# EAGLE board Drums (EAGLE 8.5.0)
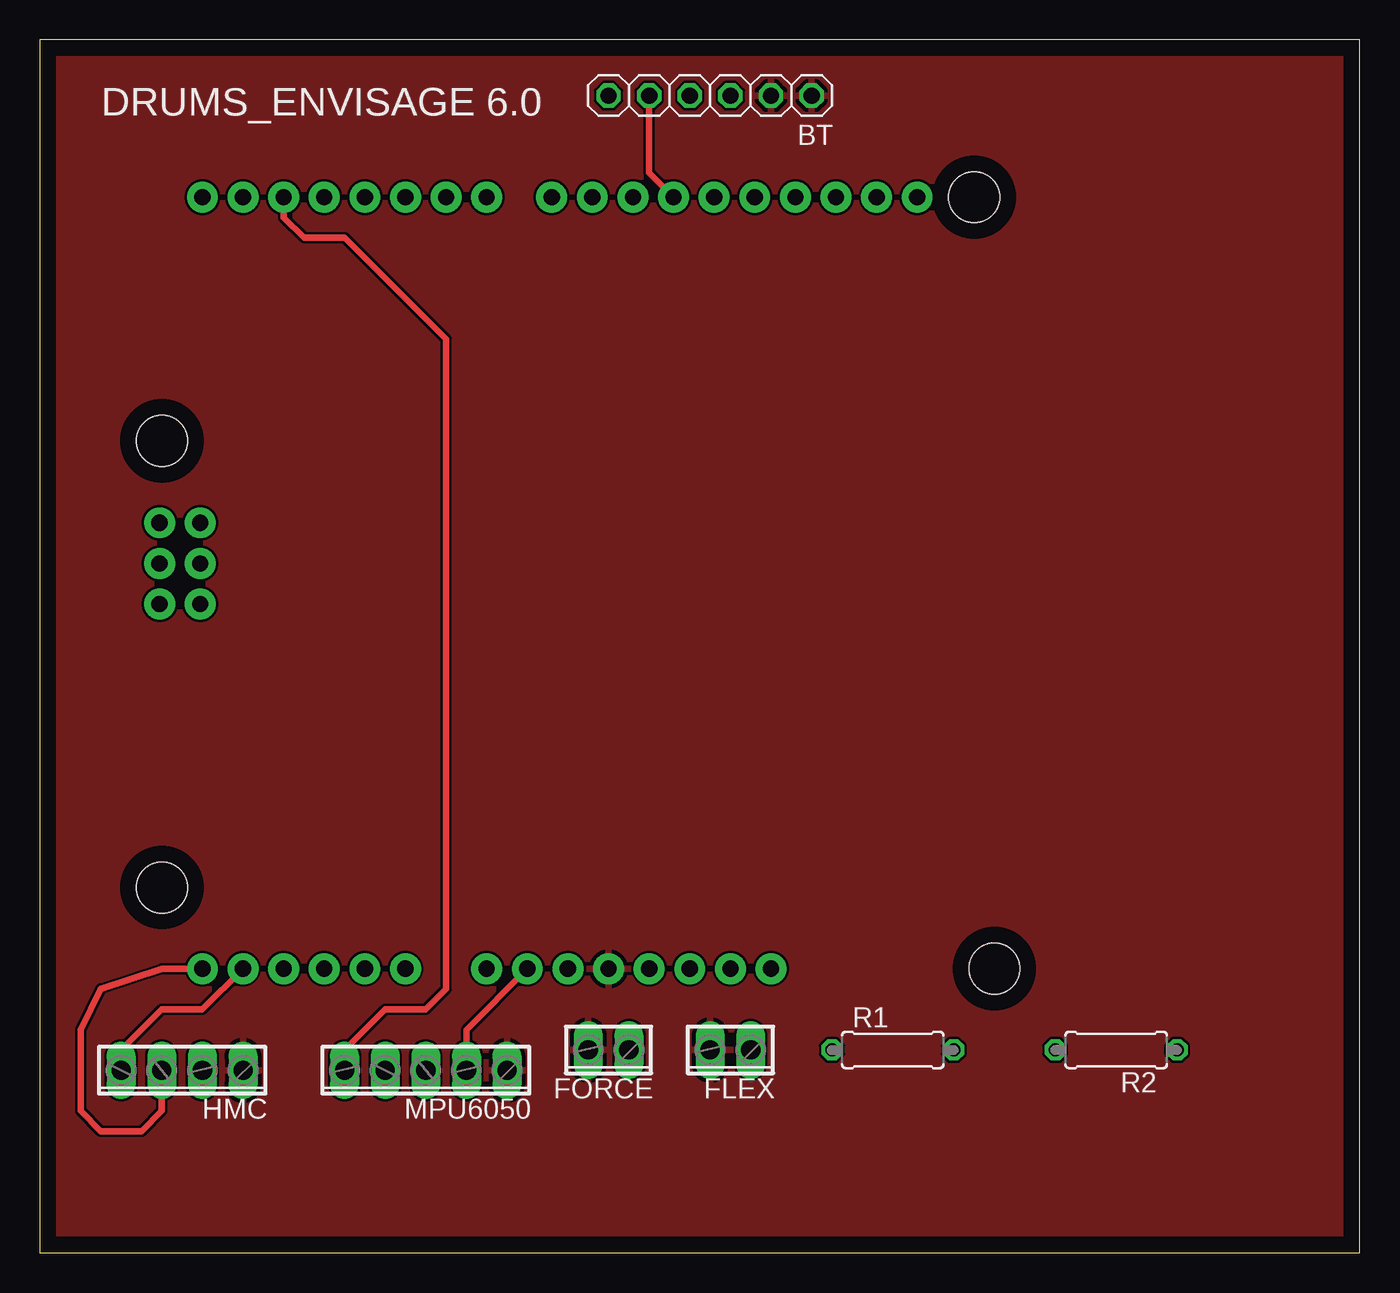
[diagram p0: board, top side]
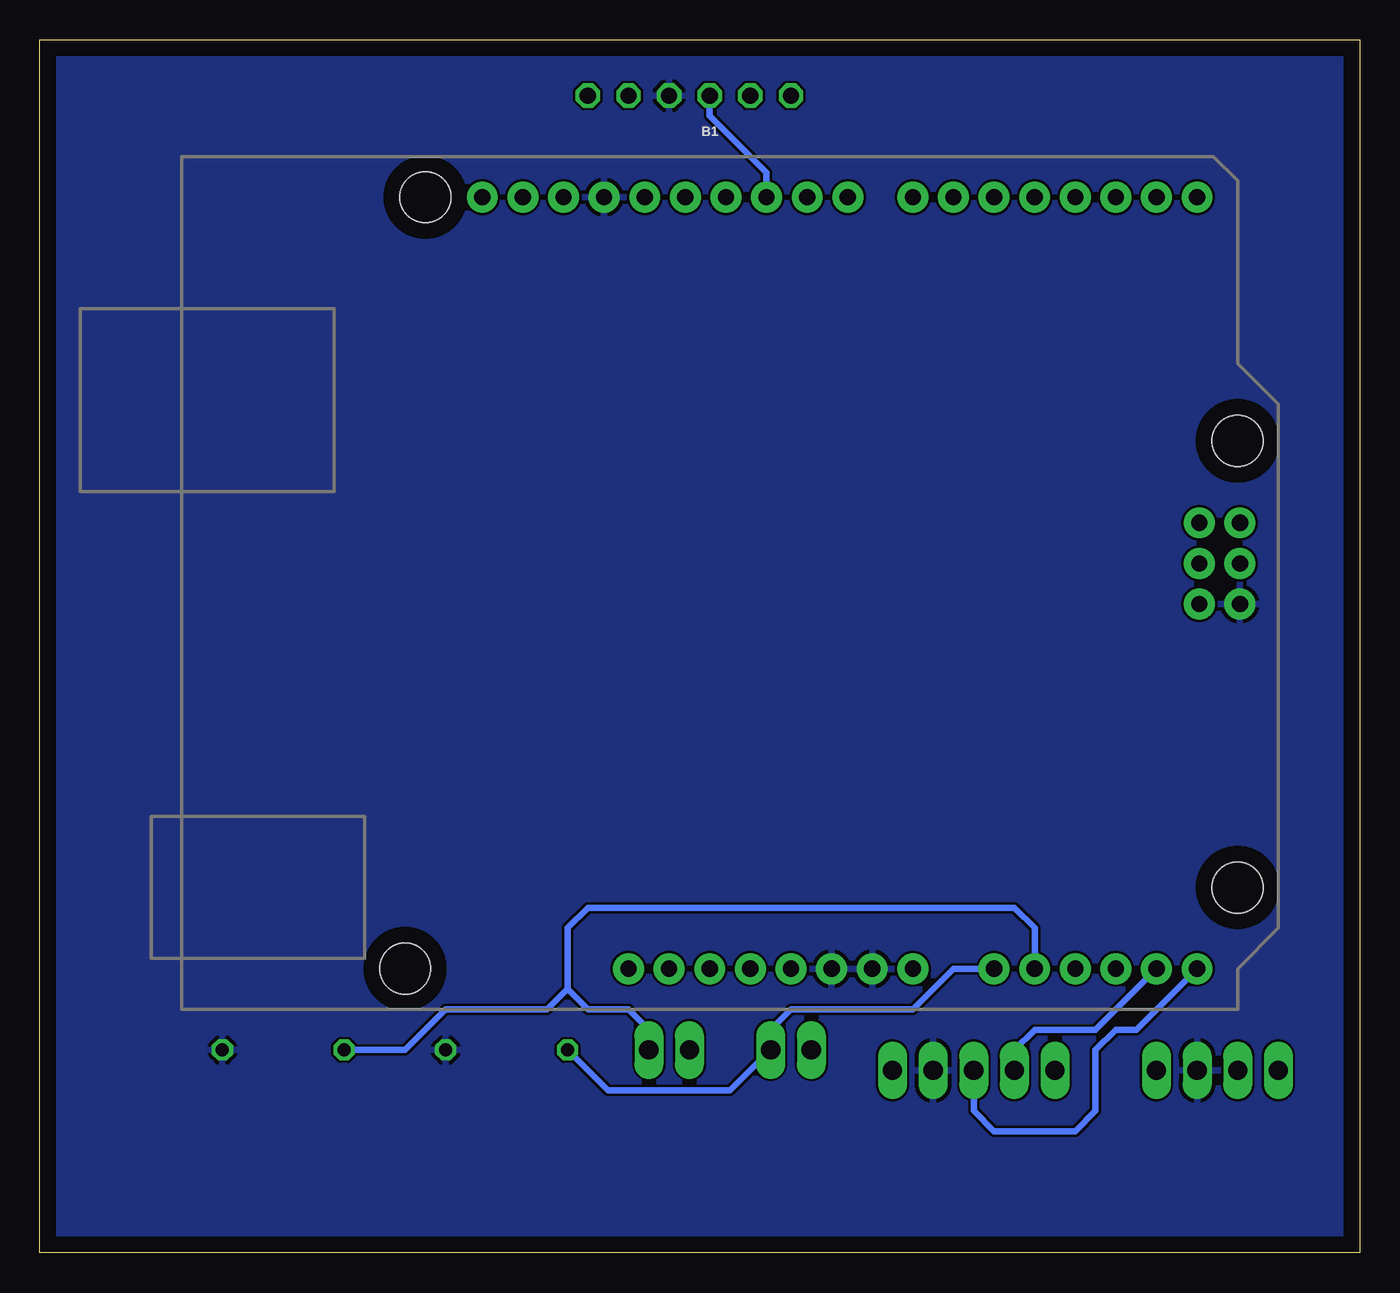
[diagram p1: board, bottom side, seen from below]

Size 82.53 x 75.87 mm. Coordinates in mm from the lower left corner, seen from the top.
Outline: 0,0 82.53,0 82.53,75.87 0,75.87 0,0
Copper layers (1*16): Top 0.035mm / dielectric 1.5mm / Bottom 0.035mm
Design rules "default": minimum track width 6mil, minimum drill 0.35mm, track to track 6mil, track to pad 6mil, pad to pad 6mil, via to via 6mil, smd to smd 6mil, copper to edge 40mil, drill to drill 6mil, minimum pad ring 10mil, minimum via ring 8mil, stop-mask expansion 4mil, vias tented up to drill 0mil, thermal gap 10mil

## Footprints (pad centres in the part's own frame; a part is rotated, then mirrored left to right if it is on the bottom)
ARDUINO_R3 = drill 1.016 pad 1.93: 3.3V 2.54,-24.13; 5V 5.08,-24.13; A0 17.78,-24.13; A1 20.32,-24.13; A2 22.86,-24.13; A3 25.4,-24.13; A4 27.94,-24.13; A5 30.48,-24.13; AREF -9.144,24.13; D0 30.48,24.13; D1 27.94,24.13; D2 25.4,24.13; D3 22.86,24.13; D4 20.32,24.13; D5 17.78,24.13; D6 15.24,24.13; D7 12.7,24.13; D8 8.636,24.13; D9 6.096,24.13; D10 3.556,24.13; D11 1.016,24.13; D12 -1.524,24.13; D13 -4.064,24.13; GND@1 7.62,-24.13; GND@2 10.16,-24.13; GND@3 -6.604,24.13; GND@4 33.16,-1.32; IOREF -2.54,-24.13; MISO 30.62,3.76; MOSI 33.16,1.22; NC -5.08,-24.13; RESET@1 0,-24.13; RESET@2 30.62,-1.32; SCK 30.62,1.22; SCL -14.224,24.13; SDA -11.684,24.13; VCC 33.16,3.76; VIN 12.7,-24.13 | hole 3.175: -17.78,24.13; 33.02,8.89; 33.02,-19.05; -19.05,-24.13
1X06 = drill 1.016 octagon: 1 -6.35,0; 2 -3.81,0; 3 -1.27,0; 4 1.27,0; 5 3.81,0; 6 6.35,0
2POL254 = drill 1.2 long: 1 -1.27,0; 2 1.27,0
4POL254 = drill 1.2 long: 1 -3.81,0; 2 -1.27,0; 3 1.27,0; 4 3.81,0
5POL254 = drill 1.2 long: 1 -5.08,0; 2 -2.54,0; 3 0,0; 4 2.54,0; 5 5.08,0
0207/7 = drill 0.813 octagon: 1 -3.81,0; 2 3.81,0

## Placement (x,y rotation side)
B1  ARDUINO_UNO_R3  [ARDUINO_R3]  40.64,41.91 0 bottom
BT  [1X06]  41.91,72.39 180 top
FLEX  [2POL254]  43.18,12.7 180 top
FORCE  [2POL254]  35.56,12.7 180 top
HMC  [4POL254]  8.89,11.43 180 top
MPU6050  [5POL254]  24.13,11.43 180 top
R1  [0207/7]  53.34,12.7 0 top
R2  [0207/7]  67.31,12.7 180 top

## Library data of the parts
B1 = SparkfunBoards
BT R1 R2 = adafruit
FLEX FORCE HMC MPU6050 = con-phoenix-254; OC_FARNELL: unknown; OC_NEWARK: unknown

## Nets
5V: B1.5V BT.1 BT.2 FLEX.2 FORCE.2 HMC.1 MPU6050.1
GND: B1.GND@1 B1.GND@2 B1.GND@3 B1.GND@4 BT.3 HMC.2 MPU6050.2 R1.2 R2.1
N$1: B1.A5 HMC.3 MPU6050.3
N$2: B1.A4 HMC.4 MPU6050.4
N$3: B1.D2 MPU6050.5
N$4: B1.A0 FORCE.1 R1.1
N$5: B1.D10 BT.4
N$6: B1.D11 BT.5
N$7: B1.A1 FLEX.1 R2.2

## Tracks (layer width: path | path; a pad name or v marks a point on that pad's centre or on a via)
5V
  pour Top: -6.35,80.01 -6.35,-5.08 90.17,-5.08 90.17,80.01
GND
  Top 0.406: MPU6050.2 26.67,13.97 B1.GND@2
  pour Bottom: -3.81,78.74 -3.81,-3.81 83.82,-3.81 85.09,-2.54 85.09,78.74 83.82,80.01 -3.81,80.01
N$1
  Top 0.406: HMC.3 7.62,8.89 6.35,7.62 3.81,7.62 2.54,8.89 2.54,13.97 3.81,16.51 7.62,17.78 B1.A5
  Bottom 0.406: B1.A5 13.97,13.97 15.24,13.97 16.51,12.7 16.51,8.89 17.78,7.62 22.86,7.62 24.13,8.89 MPU6050.3
N$2
  Top 0.406: HMC.4 5.08,12.7 7.62,15.24 10.16,15.24 B1.A4
  Bottom 0.406: B1.A4 16.51,13.97 20.32,13.97 21.59,12.7 MPU6050.4
N$3
  Top 0.406: MPU6050.5 19.05,12.7 21.59,15.24 24.13,15.24 25.4,16.51 25.4,57.15 19.05,63.5 16.51,63.5 15.24,64.77 B1.D2
N$4
  Bottom 0.406: B1.A0 25.4,17.78 27.94,15.24 35.56,15.24 36.83,13.97 FORCE.1 39.37,10.16 46.99,10.16 R1.1
N$5
  Bottom 0.406: B1.D10 37.08,67.56 40.64,71.12 BT.4
N$6
  Top 0.406: B1.D11 38.1,67.56 BT.5
N$7
  Bottom 0.406: B1.A1 20.32,20.32 21.59,21.59 48.26,21.59 49.53,20.32 49.53,16.51 | 49.53,16.51 48.26,15.24 45.72,15.24 44.45,13.97 FLEX.1 | 49.53,16.51 50.8,15.24 57.15,15.24 59.69,12.7 R2.2

## Text on the board
tNames: DRUMS_ENVISAGE 6.0